# Altium PCB demo_board_shortened_DDR.PcbDoc (part 1 of 2)
Units mil, origin at the board's own origin, x right, y up, seen from the top; angles counter-clockwise.
Board outline 6000 x 4000 mil, 4 copper layers (L1, L2, L3, L4), stack 64.6 mil thick; 47 components, 45 nets, 406 pads, 119 vias.
Unrouted connection lines stored in the file: 95.
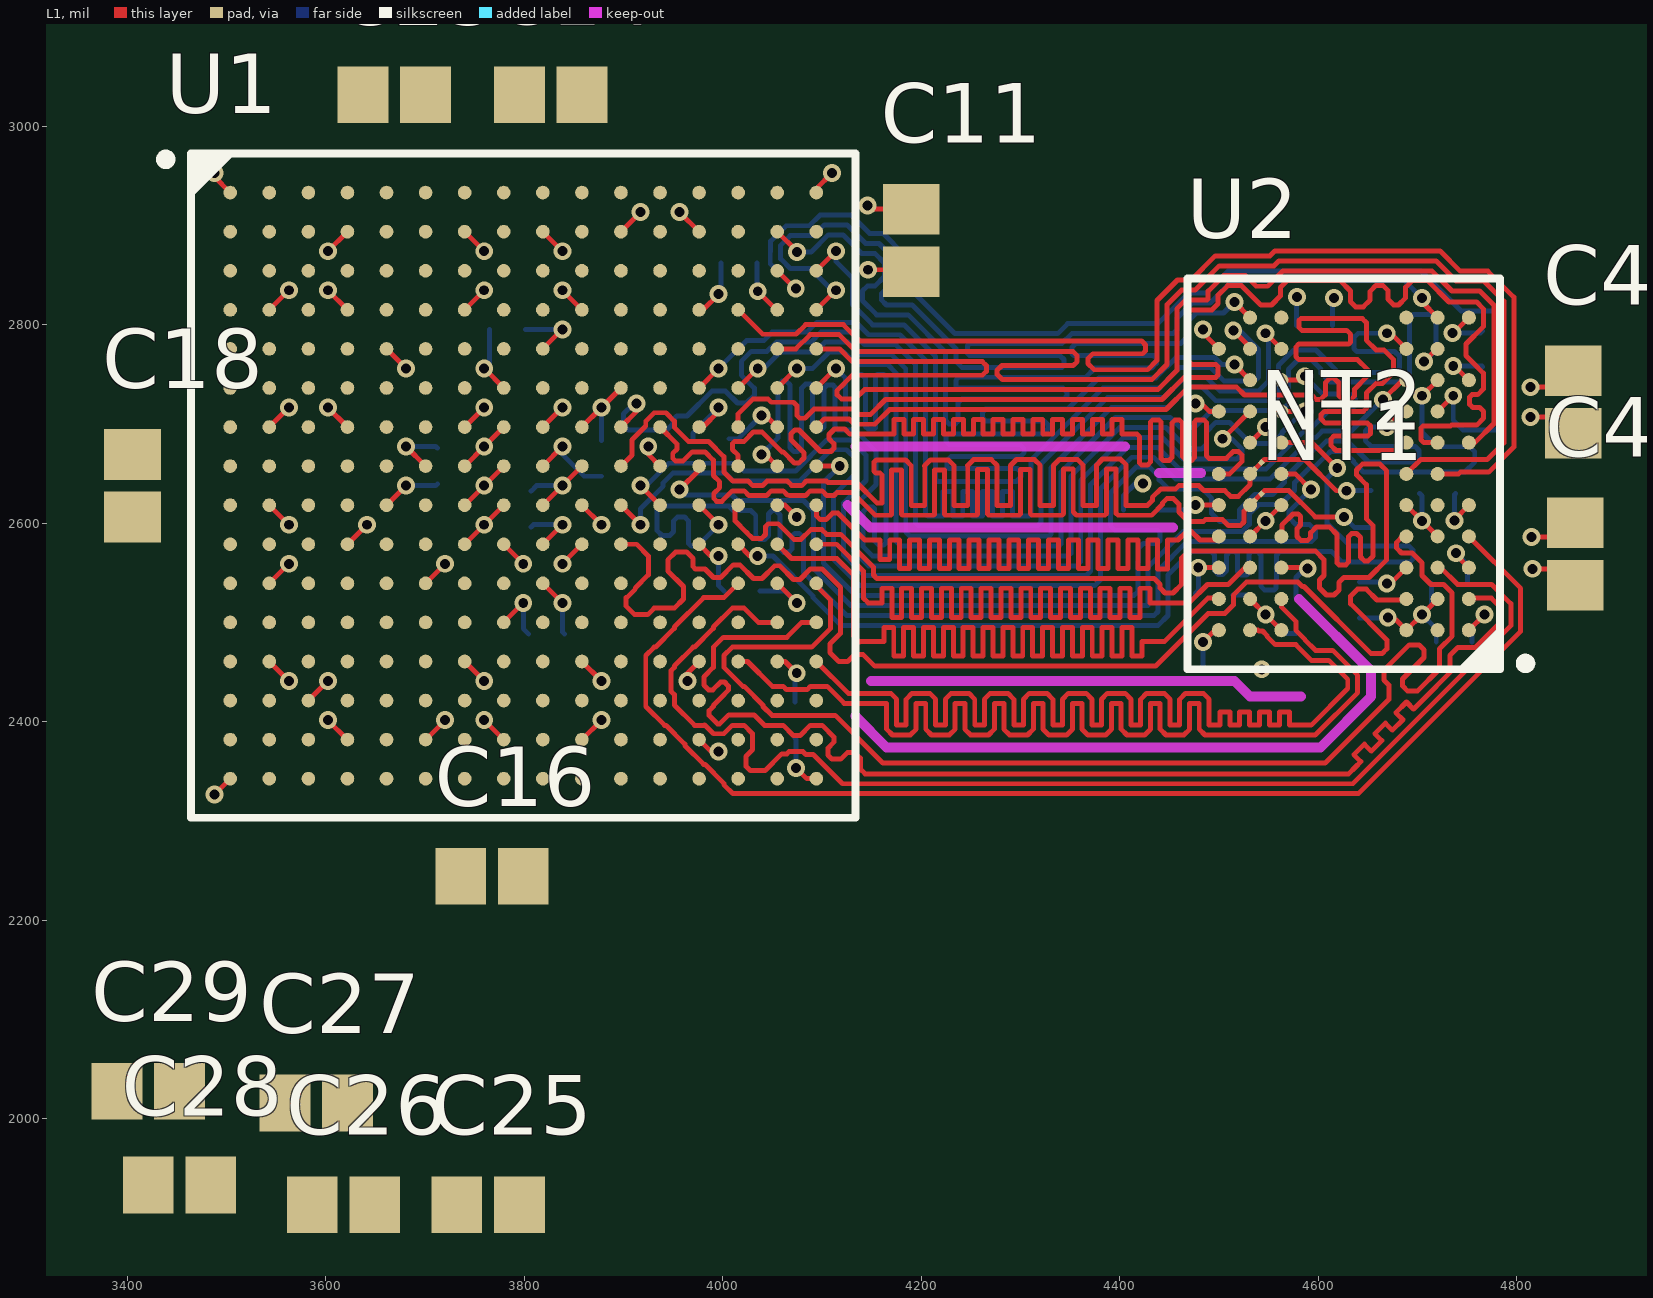
[diagram p0: L1 view]
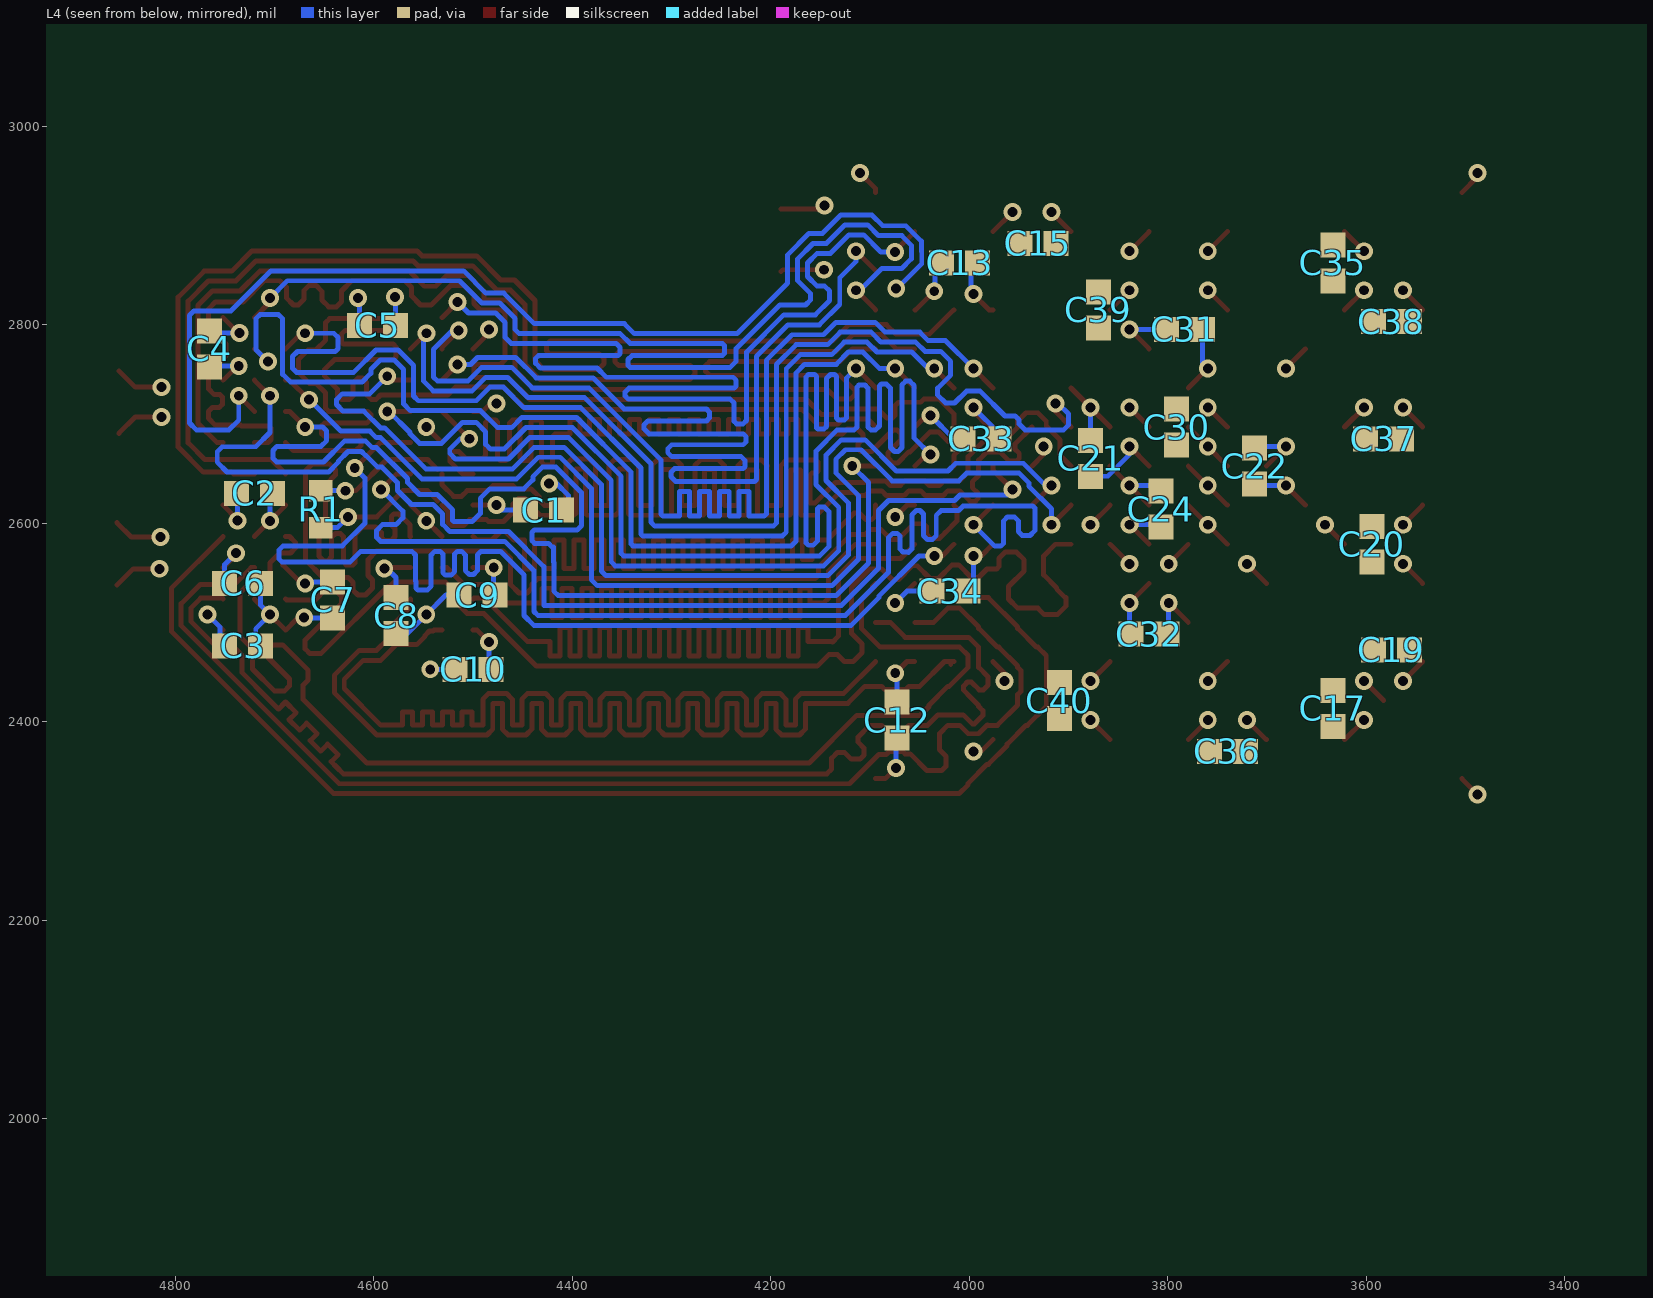
[diagram p1: L4 view, seen from below]
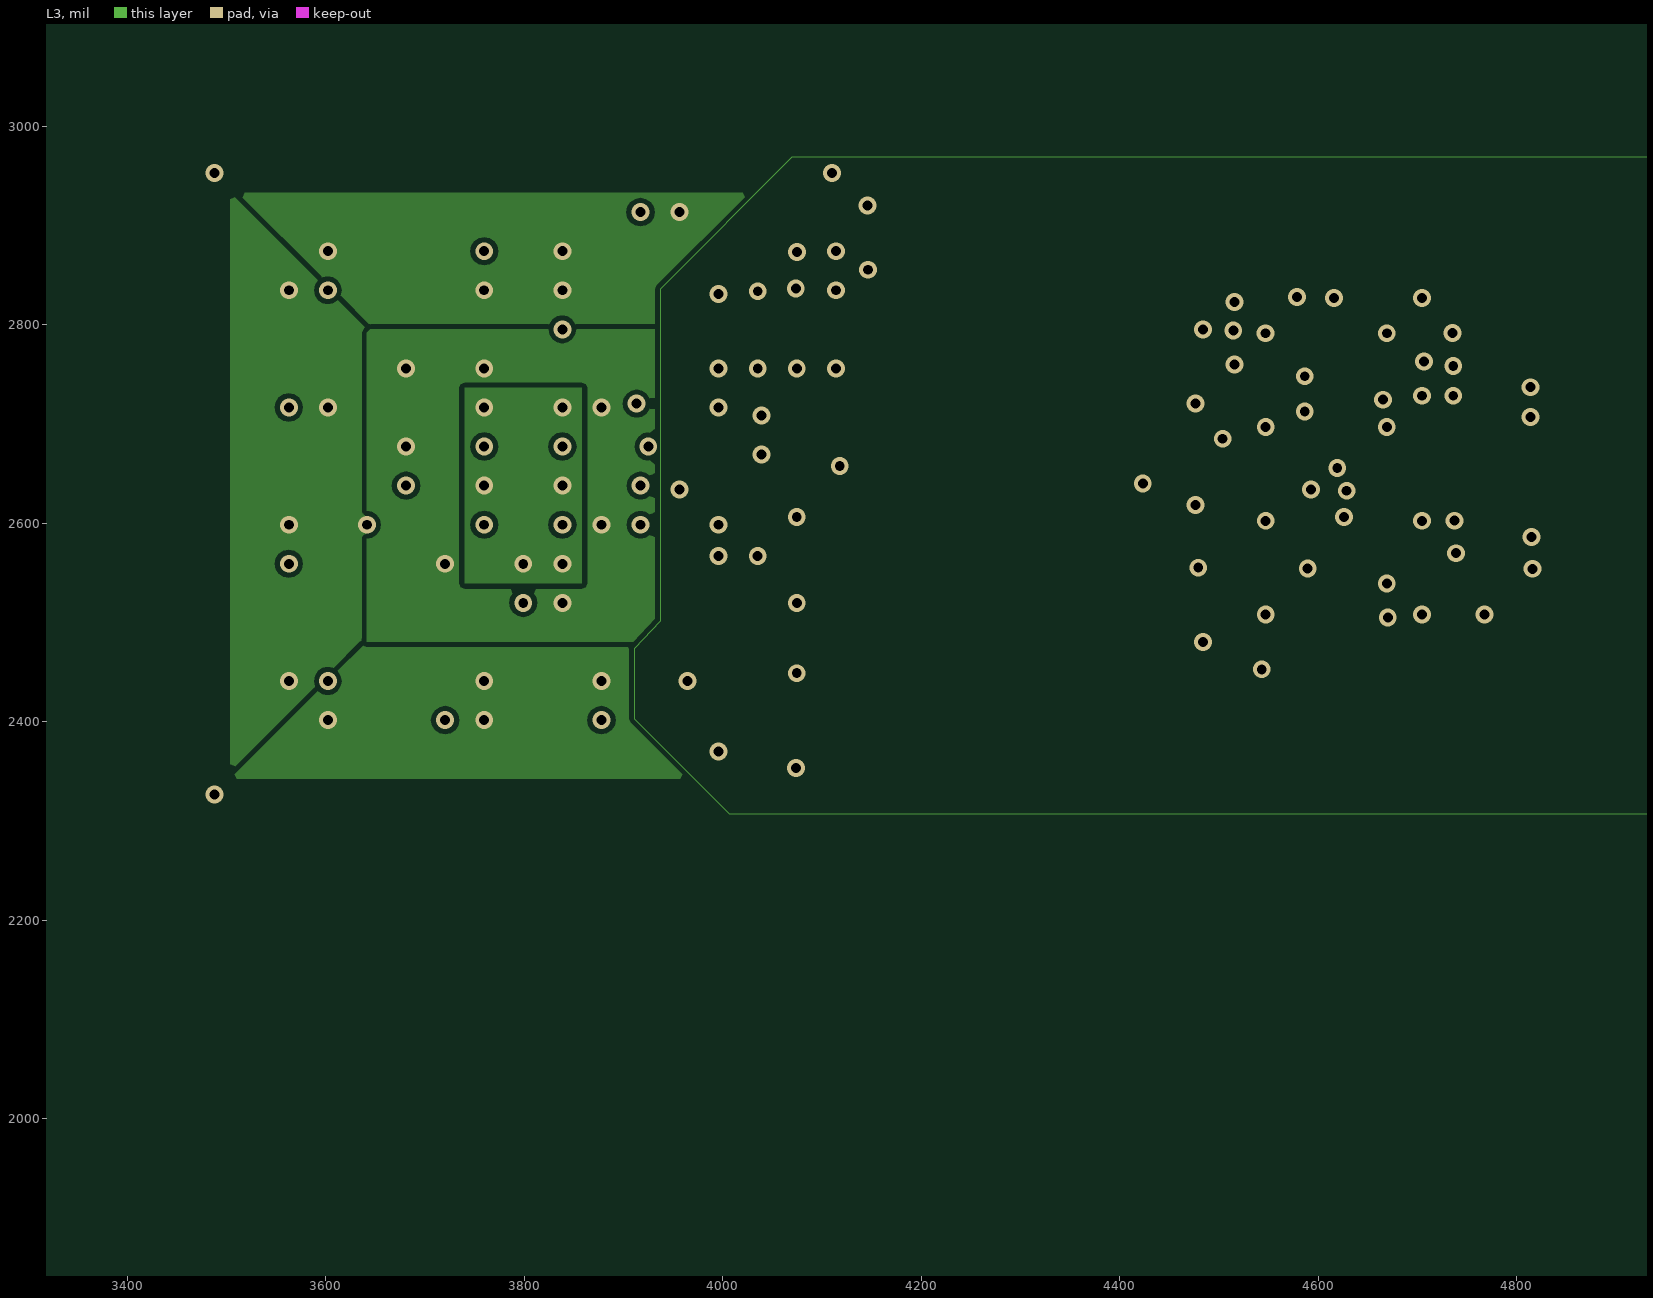
[diagram p2: L3]

## Layer stack, top to bottom
Top Solder: solder mask 0.4, Solder Resist, Dk 3.5
L1: signal copper 1.4
Prepreg 1: prepreg 6.7, FR-408, Dk 3.66
L2: signal copper 0.7
Core: core 47, FR-408, Dk 3.66
L3: signal copper 0.7
Prepreg 2: prepreg 6.7, FR-408, Dk 3.66
L4: signal copper 1.4
Bottom Solder: solder mask 0.4, Solder Resist, Dk 3.5

## Board outline
1000,1000 7000,1000 7000,5000 1000,5000

## Design rules (kind name [scope] priority, off if disabled: settings)
Clearance [All] p1: gap=5
DiffPairsRouting [All] p1: maxlimit=10 minlimit=5 mostfreqgap=5 toplayer_minwidth=5 toplayer_maxwidth=15 toplayer_prefwidth=5 midlayer1_minwidth=5 midlayer1_maxwidth=15 midlayer1_prefwidth=5 midlayer2_minwidth=5 midlayer2_maxwidth=15 midlayer2_prefwidth=5 bottomlayer_minwidth=5 bottomlayer_maxwidth=15 bottomlayer_prefwidth=5 maxuncoupledlength=500
HoleSize [All] p1: absolutevalues=TRUE maxlimit=100 minlimit=10 maxpercent=80.000 minpercent=20.000
Length "InNet('DQ6') Or InNet('DQ0')" [(InNetClass('DDR_A') OR InNetClass('DDR_D') OR InNetClass('DDR_O'))] p1: maxlimit=1285 minlimit=1275
MinimumAnnularRing [All] p1: minimumring=4
PlaneClearance [All] p1: clearance=10
PlaneConnect PlaneConnect_via [IsVia] p1: planeconnectstyle=Direct reliefexpansion=20 reliefentries=4 reliefconductorwidth=10 reliefairgap=10
PlaneConnect [All] p2: planeconnectstyle=Relief reliefexpansion=20 reliefentries=4 reliefconductorwidth=10 reliefairgap=10
PolygonConnect PolygonConnect_via [All vs IsVia] p1: connectstyle=Direct reliefconductorwidth=10 reliefentries=4 polygonreliefangle="90 Angle" airgapwidth=10
PolygonConnect [All] p2: connectstyle=Relief reliefconductorwidth=10 reliefentries=4 polygonreliefangle="90 Angle" airgapwidth=10
RoutingVias [All] p1: holewidth=10 width=32 viastyle="Through Hole" minholewidth=10 minwidth=18 maxholewidth=50 maxwidth=100
SolderMaskExpansion [All] p1: expansion=4
UnpouredPolygon [All] p1: allowunpoured=FALSE
Width [All] p1: maxlimit=100 minlimit=5 preferedwidth=10
25 further rules are at their usual default settings.

## Classes and differential pairs
net class DDR_O: BA0 BA1 BA2 CAS# CK_N CK_P CKE DM/RDQS DQS_N DQS_P NetU2_A2 ODT RAS# WE#
net class DDR_D: DQ0 DQ1 DQ2 DQ3 DQ4 DQ5 DQ6 DQ7
net class DDR_A: A0 A1 A2 A3 A4 A5 A6 A7 A8 A9 A10 A11 A12 A13
differential pair CK: +CK_P -CK_N
differential pair DQS: +DQS_P -DQS_N

## Components (designator, comment, footprint, x,y, rotation, side; value= is the part's Value field where it differs from the comment)
C1 "220n/6V3" C0402_N 4429.13,2613.19 r0 bottom
C2 "220n/6V3" C0402_N 4720.47,2629.92 r0 bottom
C3 "220n/6V3" C0402_N 4732.28,2476.38 r0 bottom
C4 "220n/6V3" C0402_N 4765.75,2775.59 r90 bottom
C5 "220n/6V3" C0402_N 4596.46,2799.21 r180 bottom
C6 "220n/6V3" C0402_N 4732.28,2539.37 r0 bottom
C7 "220n/6V3" C0402_N 4641.73,2522.64 r90 bottom
C8 "220n/6V3" C0402_N 4577.76,2506.89 r90 bottom
C9 "220n/6V3" C0402_N 4496.06,2527.56 r180 bottom
C10 "220n/6V3" C0402_N 4500,2452.76 r180 bottom
C11 "4u7/6V3" C0805_N 4189.96,2884.84 r270 top
C12 "220n/6V3" C0402_N 4072.83,2401.57 r90 bottom
C13 "220n/6V3" C0402_N 4009.84,2862.2 r0 bottom
C14 "4u7/6V3" C0805_N 3826.77,3031.5 r0 top
C15 "220n/6V3" C0402_N 3931.1,2881.89 r0 bottom
C16 "4u7/6V3" C0805_N 3767.72,2244.09 r0 top
C17 "220n/6V3" C0402_N 3633.86,2413.39 r270 bottom
C18 "4u7/6V3" C0805_N 3405.51,2637.8 r90 top
C19 "220n/6V3" C0402_N 3574.8,2472.44 r180 bottom
C20 "220n/6V3" C0402_N 3594.49,2578.74 r90 bottom
C21 "220n/6V3" C0402_N 3877.95,2665.35 r90 bottom
C22 "220n/6V3" C0402_N 3712.6,2657.48 r90 bottom
C23 "4u7/6V3" C0805_N 3669.29,3031.5 r0 top
C24 "220n/6V3" C0402_N 3807.09,2614.17 r90 bottom
C25 "4u7/6V3" C0805_N 3763.78,1913.39 r0 top
C26 "4u7/6V3" C0805_N 3618.11,1913.39 r0 top
C27 "4u7/6V3" C0805_N 3590.55,2015.75 r0 top
C28 "4u7/6V3" C0805_N 3452.76,1933.07 r0 top
C29 "4u7/6V3" C0805_N 3421.26,2027.56 r0 top
C30 "220n/6V3" C0402_N 3791.34,2696.85 r90 bottom
C31 "220n/6V3" C0402_N 3783.46,2795.28 r180 bottom
C32 "220n/6V3" C0402_N 3818.9,2488.19 r0 bottom
C33 "220n/6V3" C0402_N 3988.19,2685.04 r180 bottom
C34 "220n/6V3" C0402_N 4019.68,2531.5 r180 bottom
C35 "220n/6V3" C0402_N 3633.86,2862.2 r90 bottom
C36 "220n/6V3" C0402_N 3740.16,2370.08 r0 bottom
C37 "220n/6V3" C0402_N 3582.68,2685.04 r0 bottom
C38 "220n/6V3" C0402_N 3574.8,2803.15 r180 bottom
C39 "220n/6V3" C0402_N 3870.08,2814.96 r90 bottom
C40 "220n/6V3" C0402_N 3909.45,2421.26 r90 bottom
C41 "4u7/6V3" C0805_N 4857,2722 r270 top
C42 "4u7/6V3" C0805_N 4859,2569 r90 top
NT1 "NET TIE" NET_TIE_5MIL_2 4539.37,2625.98 r45 top net-tie
NT2 "NET TIE" NET_TIE_5MIL_2 4539.37,2657.48 r225 top net-tie
R1 "N.C." R0402_N 4653.54,2614.17 r90 bottom
U1 "XC6SLX16-2FTG256C" Xilinx_FT256 3799.21,2637.8 r0 top
U2 "AS4C128M8D2-25BCN" Alliance_FBGA60 4625.98,2649.61 r180 top

## Footprints (in the part's own frame and the unit in brackets; to place one, negate y for a bottom-side part, rotate by r counter-clockwise, add the part's x,y. Pads: shape width x height; smd on the part's side, far side on the other; paste and mask are expansions set on the pad)
Alliance_FBGA60 [mm] "BGA, 60-Leads, Body 8.00x10.00mmx1.20mm, Pitch 0.80mm"
  round 0.36 smd: A1(-3.2,4) A2(-2.4,4) A3(-1.6,4) A7(1.6,4) A8(2.4,4) A9(3.2,4) B1(-3.2,3.2) B2(-2.4,3.2) B3(-1.6,3.2) B7(1.6,3.2) B8(2.4,3.2) B9(3.2,3.2) C1(-3.2,2.4) C2(-2.4,2.4) C3(-1.6,2.4) C7(1.6,2.4) C8(2.4,2.4) C9(3.2,2.4) D1(-3.2,1.6) D2(-2.4,1.6) D3(-1.6,1.6) D7(1.6,1.6) D8(2.4,1.6) D9(3.2,1.6) E1(-3.2,0.8) E2(-2.4,0.8) E3(-1.6,0.8) E7(1.6,0.8) E8(2.4,0.8) E9(3.2,0.8) F2(-2.4,0) F3(-1.6,0) F7(1.6,0) F8(2.4,0) F9(3.2,0) G1(-3.2,-0.8) G2(-2.4,-0.8) G3(-1.6,-0.8) G7(1.6,-0.8) G8(2.4,-0.8) H2(-2.4,-1.6) H3(-1.6,-1.6) H7(1.6,-1.6) H8(2.4,-1.6) H9(3.2,-1.6) J1(-3.2,-2.4) J2(-2.4,-2.4) J3(-1.6,-2.4) J7(1.6,-2.4) J8(2.4,-2.4) K2(-2.4,-3.2) K3(-1.6,-3.2) K7(1.6,-3.2) K8(2.4,-3.2) K9(3.2,-3.2) L1(-3.2,-4) L2(-2.4,-4) L3(-1.6,-4) L7(1.6,-4) L8(2.4,-4)
  silkscreen extent -4.78,-5 4,5, body extent -4,-5 4,5, height 1.2
C0402_N [mm] "Chip Capacitor, 2-Leads, Body 1.00x0.50mm, IPC Medium Density"
  rect 0.64x0.64 smd: 1(-0.46,0) 2(0.46,0)
  body extent -0.55,-0.3 0.55,0.3, height 0.6
C0805_N [mm] "Chip Capacitor, 2-Leads, Body 2.00x1.25mm, IPC Medium Density"
  rect 1.3x1.45 smd: 1(-0.8,0) 2(0.8,0)
  body extent -1.1,-0.72 1.1,0.72, height 1.1
NET_TIE_5MIL_2 [mil] "5mil net tie with 2 pins"
  rect 5x5 smd paste-10 mask-10: 1(-5,0) 2(5,0)
  L1 lines w5: -5,0 5,0
R0402_N [mm] "Chip Resistor, 2-Leads, Body 1.05x0.54mm, IPC Medium Density"
  rect 0.55x0.6 smd: 1(-0.475,0) 2(0.475,0)
  body extent -0.55,-0.3 0.55,0.3, height 0.4
Xilinx_FT256 [mm] "BGA, 256-Leads, Body 17.00x17.00mmx1.55mm, Pitch 1.00mm"
  round 0.35 smd: A1(-7.5,7.5) A2(-6.5,7.5) A3(-5.5,7.5) A4(-4.5,7.5) A5(-3.5,7.5) A6(-2.5,7.5) A7(-1.5,7.5) A8(-0.5,7.5) A9(0.5,7.5) A10(1.5,7.5) A11(2.5,7.5) A12(3.5,7.5) A13(4.5,7.5) A14(5.5,7.5) A15(6.5,7.5) A16(7.5,7.5) B1(-7.5,6.5) B2(-6.5,6.5) B3(-5.5,6.5) B4(-4.5,6.5) B5(-3.5,6.5) B6(-2.5,6.5) B7(-1.5,6.5) B8(-0.5,6.5) B9(0.5,6.5) B10(1.5,6.5) B11(2.5,6.5) B12(3.5,6.5) B13(4.5,6.5) B14(5.5,6.5) B15(6.5,6.5) B16(7.5,6.5) C1(-7.5,5.5) C2(-6.5,5.5) C3(-5.5,5.5) C4(-4.5,5.5) C5(-3.5,5.5) C6(-2.5,5.5) C7(-1.5,5.5) C8(-0.5,5.5) C9(0.5,5.5) C10(1.5,5.5) C11(2.5,5.5) C12(3.5,5.5) C13(4.5,5.5) C14(5.5,5.5) C15(6.5,5.5) C16(7.5,5.5) D1(-7.5,4.5) D2(-6.5,4.5) D3(-5.5,4.5) D4(-4.5,4.5) D5(-3.5,4.5) D6(-2.5,4.5) D7(-1.5,4.5) D8(-0.5,4.5) D9(0.5,4.5) D10(1.5,4.5) D11(2.5,4.5) D12(3.5,4.5) D13(4.5,4.5) D14(5.5,4.5) D15(6.5,4.5) D16(7.5,4.5) E1(-7.5,3.5) E2(-6.5,3.5) E3(-5.5,3.5) E4(-4.5,3.5) E5(-3.5,3.5) E6(-2.5,3.5) E7(-1.5,3.5) E8(-0.5,3.5) E9(0.5,3.5) E10(1.5,3.5) E11(2.5,3.5) E12(3.5,3.5) E13(4.5,3.5) E14(5.5,3.5) E15(6.5,3.5) E16(7.5,3.5) F1(-7.5,2.5) F2(-6.5,2.5) F3(-5.5,2.5) F4(-4.5,2.5) F5(-3.5,2.5) F6(-2.5,2.5) F7(-1.5,2.5) F8(-0.5,2.5) F9(0.5,2.5) F10(1.5,2.5) F11(2.5,2.5) F12(3.5,2.5) F13(4.5,2.5) F14(5.5,2.5) F15(6.5,2.5) F16(7.5,2.5) G1(-7.5,1.5) G2(-6.5,1.5) G3(-5.5,1.5) G4(-4.5,1.5) G5(-3.5,1.5) G6(-2.5,1.5) G7(-1.5,1.5) G8(-0.5,1.5) G9(0.5,1.5) G10(1.5,1.5) G11(2.5,1.5) G12(3.5,1.5) G13(4.5,1.5) G14(5.5,1.5) G15(6.5,1.5) G16(7.5,1.5) H1(-7.5,0.5) H2(-6.5,0.5) H3(-5.5,0.5) H4(-4.5,0.5) H5(-3.5,0.5) H6(-2.5,0.5) H7(-1.5,0.5) H8(-0.5,0.5) H9(0.5,0.5) H10(1.5,0.5) H11(2.5,0.5) H12(3.5,0.5) H13(4.5,0.5) H14(5.5,0.5) H15(6.5,0.5) H16(7.5,0.5) J1(-7.5,-0.5) J2(-6.5,-0.5) J3(-5.5,-0.5) J4(-4.5,-0.5) J5(-3.5,-0.5) J6(-2.5,-0.5) J7(-1.5,-0.5) J8(-0.5,-0.5) J9(0.5,-0.5) J10(1.5,-0.5) J11(2.5,-0.5) J12(3.5,-0.5) J13(4.5,-0.5) J14(5.5,-0.5) J15(6.5,-0.5) J16(7.5,-0.5) K1(-7.5,-1.5) K2(-6.5,-1.5) K3(-5.5,-1.5) K4(-4.5,-1.5) K5(-3.5,-1.5) K6(-2.5,-1.5) K7(-1.5,-1.5) K8(-0.5,-1.5) K9(0.5,-1.5) K10(1.5,-1.5) K11(2.5,-1.5) K12(3.5,-1.5) K13(4.5,-1.5) K14(5.5,-1.5) K15(6.5,-1.5) K16(7.5,-1.5) L1(-7.5,-2.5) L2(-6.5,-2.5) L3(-5.5,-2.5) L4(-4.5,-2.5) L5(-3.5,-2.5) L6(-2.5,-2.5) L7(-1.5,-2.5) L8(-0.5,-2.5) L9(0.5,-2.5) L10(1.5,-2.5) L11(2.5,-2.5) L12(3.5,-2.5) L13(4.5,-2.5) L14(5.5,-2.5) L15(6.5,-2.5) L16(7.5,-2.5) M1(-7.5,-3.5) M2(-6.5,-3.5) M3(-5.5,-3.5) M4(-4.5,-3.5) M5(-3.5,-3.5) M6(-2.5,-3.5) M7(-1.5,-3.5) M8(-0.5,-3.5) M9(0.5,-3.5) M10(1.5,-3.5) M11(2.5,-3.5) M12(3.5,-3.5) M13(4.5,-3.5) M14(5.5,-3.5) M15(6.5,-3.5) M16(7.5,-3.5) N1(-7.5,-4.5) N2(-6.5,-4.5) N3(-5.5,-4.5) N4(-4.5,-4.5) N5(-3.5,-4.5) N6(-2.5,-4.5) N7(-1.5,-4.5) N8(-0.5,-4.5) N9(0.5,-4.5) N10(1.5,-4.5) N11(2.5,-4.5) N12(3.5,-4.5) N13(4.5,-4.5) N14(5.5,-4.5) N15(6.5,-4.5) N16(7.5,-4.5) P1(-7.5,-5.5) P2(-6.5,-5.5) P3(-5.5,-5.5) P4(-4.5,-5.5) P5(-3.5,-5.5) P6(-2.5,-5.5) P7(-1.5,-5.5) P8(-0.5,-5.5) P9(0.5,-5.5) P10(1.5,-5.5) P11(2.5,-5.5) P12(3.5,-5.5) P13(4.5,-5.5) P14(5.5,-5.5) P15(6.5,-5.5) P16(7.5,-5.5) R1(-7.5,-6.5) R2(-6.5,-6.5) R3(-5.5,-6.5) R4(-4.5,-6.5) R5(-3.5,-6.5) R6(-2.5,-6.5) R7(-1.5,-6.5) R8(-0.5,-6.5) R9(0.5,-6.5) R10(1.5,-6.5) R11(2.5,-6.5) R12(3.5,-6.5) R13(4.5,-6.5) R14(5.5,-6.5) R15(6.5,-6.5) R16(7.5,-6.5) T1(-7.5,-7.5) T2(-6.5,-7.5) T3(-5.5,-7.5) T4(-4.5,-7.5) T5(-3.5,-7.5) T6(-2.5,-7.5) T7(-1.5,-7.5) T8(-0.5,-7.5) T9(0.5,-7.5) T10(1.5,-7.5) T11(2.5,-7.5) T12(3.5,-7.5) T13(4.5,-7.5) T14(5.5,-7.5) T15(6.5,-7.5) T16(7.5,-7.5)
  silkscreen extent -9.27,-8.5 8.5,8.5, body extent -8.5,-8.5 8.5,8.5, height 1.55

## Part data
C1 C2 C3 C4 C5 C6 C7 C8 C9 C10 C11 C12 C13 C14 C15 C16 C17 C18 C19 C20 C21 C22 C23 C24 C25 C26 C27 C28 C29 C30 C31 C32 C33 C34 C35 C36 C37 C38 C39 C40 C41 C42: library part C
R1: library part R

## Via types
v1: diameter 18, hole 10, L1 to L4, 119 vias

## Nets (pads, with @x,y where several pads share a name; then routed paths per layer and width w, separated by ;. In a path a pad name is that pad's centre, name@x,y a point inside that pad or via, vN(x,y) a via of type N, cw(c..) or ccw(c..) an arc to the next point about the centre after c; other vN are vias at no path point)
A0: U1.H15 U2.H8 | length 1157.4
  L1 w5: v1(4039.18,2669.1) 4039.18,2673.05 4039.36,2673.24 4041.34,2671.26 U1.H15@4055.12,2657.48 ; v1(4503.93,2685.03) U2.H8@4531.5,2712.6
  L4 w5: v1(4039.18,2669.1) 4055.68,2685.6 4055.68,2738.75 4060.04,2743.11 4064.26,2743.11 4067.91,2739.46 4067.91,2676.18 4071.85,2672.24 4075.59,2672.24 4079.52,2676.18 4079.52,2736.02 4083.66,2740.16 4088.58,2740.16 4090.55,2738.19 4090.55,2697.83 4094.41,2693.97 4099.41,2693.97 4102.36,2696.93 4102.36,2736.22 4105.31,2739.17 4111.22,2739.17 4113.19,2737.2 4113.19,2696.93 4116.14,2693.97 4133.22,2693.97 4154.6,2672.59 4154.6,2638.85 4131.69,2615.94 4131.69,2572.15 4146.8,2557.05 4356.95,2557.05 4360.93,2561.02 4360.93,2643.13 4404.18,2686.39 4442.7,2686.39 4464.41,2664.68 4518.03,2664.68 4523.62,2670.28 4523.62,2674.53 4513.12,2685.03 v1(4503.93,2685.03)
A1: U1.H16 U2.H3 | length 1155.3
  L1 w5: U1.H16@4094.49,2657.48 v1(4118.1,2657.47) ; v1(4669.29,2696.85) 4685.04,2712.6 U2.H3@4688.98,2712.6
  L4 w5: v1(4118.1,2657.47) 4101.69,2641.07 4101.69,2559.72 4134.37,2527.05 4414.37,2527.05 4418.82,2531.5 4418.82,2560.37 4419.29,2560.84 4419.29,2575.79 ; 4420.28,2575.79 4424.12,2579.63 4438.08,2579.63 4440.94,2582.49 4440.94,2590.55 4438.41,2593.09 4395.32,2593.09 4390.93,2597.48 4390.93,2630.71 4416.61,2656.39 4430.28,2656.39 4439.94,2646.73 4439.94,2643.7 4449.03,2634.61 4483.27,2634.61 4492.88,2625 4492.88,2609.72 4500.98,2601.62 4519.48,2601.62 4520.74,2602.88 4520.74,2613.34 4536.27,2628.86 4554.06,2628.86 4566.25,2641.06 4566.25,2644.96 4597.39,2676.1 4601.73,2676.1 4608.27,2682.63 4629.82,2682.63 4650.87,2661.57 4697.99,2661.57 4701.77,2665.35 4701.77,2673.23 4697.83,2677.17 4653.54,2677.17 4647.64,2683.07 4647.64,2692.91 4651.57,2696.85 v1(4669.29,2696.85)
A2: U1.F16 U2.H7 | length 1157.6
  L1 w5: U1.F16@4094.49,2736.22 v1(4114.17,2755.91) ; U2.H7@4562.99,2712.6 v1(4586.61,2712.6)
  L4 w5: v1(4114.17,2755.91) 4124,2746.08 4124,2705.97 4126,2703.97 4131.98,2703.97 4134,2706 4134,2747.84 4136,2749.84 4140,2749.84 4144,2745.84 4144,2697.34 4146.67,2694.67 4152.67,2694.67 4154,2696 4154,2747.84 4156,2749.84 4162.16,2749.84 4164.6,2747.4 4164.6,2579.96 4162.4,2577.76 4157.48,2577.76 4153,2582.24 4153,2614.72 4151.57,2616.14 4146.04,2616.14 4141.69,2611.79 4141.69,2576.29 4150.94,2567.05 4348.43,2567.05 4350.93,2569.55 4350.93,2647.28 4400.04,2696.39 4446.85,2696.39 4468.55,2674.68 4482.76,2674.68 4487.43,2679.36 4487.43,2691.87 4497.09,2701.53 4510.76,2701.53 4531.95,2680.35 4554.08,2680.35 4563.74,2690.02 4563.74,2691.31 4585.04,2712.6 v1(4586.61,2712.6)
A3: U1.H13 U2.J2 | length 1157.8
  L1 w5: v1(3956.69,2633.86) 3976.38,2653.54 U1.H13@3976.38,2657.48 ; v1(4704.72,2728.35) U2.J2@4720.47,2744.09
  L4 w5: v1(3956.69,2633.86) 3962.22,2628.33 4009.47,2628.33 4015,2622.79 4081.63,2622.79 4091.69,2612.73 4091.69,2554.41 4129.06,2517.05 4428.82,2517.05 4428.82,2556.22 4464.21,2591.62 4523.62,2591.62 4530.74,2598.74 4530.74,2609.2 4540.41,2618.86 4562.24,2618.86 4576.25,2632.87 4576.25,2640.82 4591.93,2656.5 4596.27,2656.5 4608.18,2668.4 4608.75,2668.4 4612.5,2672.14 4626.17,2672.14 4635.83,2662.48 4635.83,2661.41 4645.67,2651.57 4748.03,2651.57 4757.87,2661.42 4757.87,2672 4752.87,2677 4719,2677 4704.72,2691.28 v1(4704.72,2728.35)
A4: U1.C16 U2.J8 | length 1153.7
  L1 w5: U1.C16@4094.49,2854.33 v1(4114.17,2874.02) ; v1(4515.75,2759.84) U2.J8@4531.5,2744.09
  L4 w5: v1(4114.17,2874.02) 4114.17,2863.83 4130.67,2847.33 4130.67,2820.35 4151.18,2799.84 4182.87,2799.84 4214.6,2768.11 4214.6,2644 4216.55,2642.05 4295.97,2642.05 4300.93,2647 4300.93,2651.07 4297,2655 4228,2655 4226,2657 4226,2663 4230,2667 4299.94,2667 4304,2671.06 4304,2675 4300,2679 4228,2679 4225,2682 4225,2687 4228,2690 4322.94,2690 4327.94,2695 4327.94,2699.06 4324,2703 4265,2703 4262,2706 4262,2712 4265,2715 4347.94,2715 4379.33,2746.39 4436.54,2746.39 4457.12,2766.97 4495.64,2766.97 4502.77,2759.84 v1(4515.75,2759.84)
A5: U1.J11 U2.J3 | length 1155.3
  L1 w5: U1.J11@3897.64,2618.11 v1(3917.32,2598.43) ; v1(4665.34,2724.4) 4685.04,2744.09 U2.J3@4688.98,2744.09
  L4 w5: v1(3917.32,2598.43) 3917.32,2614.46 3940.19,2637.33 3940.19,2640.69 3949.86,2650.36 4002.9,2650.36 4010.65,2642.6 4077.83,2642.6 4109.2,2673.97 4124.94,2673.97 4134.6,2664.31 4134.6,2650.64 4111.69,2627.73 4111.69,2563.87 4138.51,2537.05 4375,2537.05 4380.93,2542.97 4380.93,2634.85 4412.47,2666.39 4434.42,2666.39 4456.2,2644.61 4487.41,2644.61 4487.48,2644.68 4551.83,2644.68 4593.25,2686.1 4597.59,2686.1 4604.13,2692.63 4633.22,2692.63 4664.99,2724.4 v1(4665.34,2724.4) v1@4666.5,2724.4
A6: U1.J12 U2.J7 | length 1155.7
  L1 w5: v1(3917.32,2637.8) U1.J12@3937.01,2618.11 ; U2.J7@4562.99,2744.09 4586.6,2744.09 v1(4586.6,2748.03)
  L4 w5: v1(3917.32,2637.8) 3923.15,2637.8 3945.72,2660.36 4013.85,2660.36 4021.61,2652.6 4073.69,2652.6 4105.06,2683.97 4129.08,2683.97 4144.6,2668.45 4144.6,2642.99 4121.69,2620.08 4121.69,2568.01 4142.65,2547.05 4366.14,2547.05 4370.93,2551.83 4370.93,2638.99 4408.33,2676.39 4438.56,2676.39 4460.27,2654.68 4547.69,2654.68 4589.11,2696.1 4593.45,2696.1 4610.24,2712.89 4631.19,2712.89 4637.8,2719.49 4637.8,2724.41 4631.89,2730.32 4604.32,2730.32 v1(4586.6,2748.03)
A7: U1.F15 U2.K2 | length 1150.3
  L1 w5: U1.F15@4055.12,2736.22 v1(4074.8,2755.91) ; v1(4706.69,2762.8) 4719.49,2775.59 U2.K2@4720.47,2775.59
  L4 w5: v1(4074.8,2755.91) 4090.84,2755.91 4107.34,2772.41 4122.05,2772.41 4133.86,2760.59 4133.86,2759.84 4166.3,2759.84 4174.6,2751.54 4174.6,2582 4179.55,2577.05 4338.97,2577.05 4340.93,2579 4340.93,2651.42 4395.9,2706.39 4450.99,2706.39 4461.19,2696.19 4475.43,2696.19 4492.58,2713.34 4540.4,2713.34 4563.35,2713.35 4570.1,2720.1 4570.1,2754.86 4579.77,2764.53 4593.44,2764.53 4603.1,2754.86 4603.1,2750.94 4612.04,2742 4684,2742 4692,2750 4692,2806 4696.27,2810.27 4714.73,2810.27 4718.97,2806.03 4718.97,2774.97 4706.8,2762.8 v1(4706.69,2762.8)
A8: U1.F13 U2.K8 | length 1150.8
  L1 w5: U1.F13@3976.38,2736.22 v1(3996.06,2755.91) ; v1(4514.62,2794.14) 4531.5,2777.27 U2.K8@4531.5,2775.59
  L4 w5: v1(3996.06,2755.91) 4024.08,2783.92 4041.53,2783.92 4050.02,2792.41 4084.91,2792.41 4094.91,2802.41 4134.47,2802.41 4147.04,2789.84 4178.73,2789.84 4204.6,2763.97 4204.6,2609.45 4207,2607.05 4217,2607.05 4222,2607.05 4222,2632.05 4232,2632.05 4232,2607.05 4242,2607.05 4242,2632.05 4252,2632.05 4252,2607.05 4262,2607.05 4262,2632.05 4272,2632.05 4272,2607.05 4282,2607.05 4282,2632.05 4292,2632.05 4292,2607.05 4294,2607.05 4308.97,2607.05 4310.93,2609 4310.93,2663.84 4383.47,2736.39 4440.68,2736.39 4461.26,2756.97 4491.5,2756.97 4505.13,2743.34 4527.98,2743.34 4536.21,2743.35 4540,2747.14 4540,2775.23 4521.09,2794.14 v1(4514.62,2794.14)
A9: U1.F14 U2.K3 | length 1153.4
  L1 w5: U1.F14@4015.75,2736.22 v1(4035.43,2755.91) ; v1(4669.29,2791.34) 4673.23,2791.34 U2.K3@4688.98,2775.59
  L4 w5: v1(4035.43,2755.91) 4041.8,2755.91 4058.3,2772.41 4093.2,2772.41 4103.2,2782.41 4126.19,2782.41 4138.75,2769.84 4170.44,2769.84 4184.6,2755.68 4184.6,2591 4188.55,2587.05 4329,2587.05 4330.93,2588.97 4330.93,2655.56 4391.76,2716.39 4448.96,2716.39 4469.54,2736.97 4483.21,2736.97 4496.84,2723.34 4536.26,2723.34 4555.35,2723.35 4560.1,2728.1 4560.1,2759 4575.63,2774.53 4598,2774.53 4620.53,2752 4678,2752 4682,2756 4682,2768 4677,2773 4639,2773 4636,2776 4636,2787 4640.34,2791.34 v1(4669.29,2791.34)
A10: U1.C15 U2.H2 | length 1156.2
  L1 w5: U1.C15@4055.12,2854.33 4072.83,2836.61 v1(4073.82,2836.61) ; U2.H2@4720.47,2712.6 v1(4736.21,2728.34)
  L4 w5: v1(4073.82,2836.61) 4072.76,2836.61 4048.05,2861.32 4048.05,2873 4048.5,2873.45 4048.5,2884.15 4064.03,2899.67 4087.51,2899.67 4098.36,2910.52 4129.58,2910.52 4148.28,2891.82 4161.77,2891.82 4183.15,2870.43 4183.15,2841.98 4234.14,2791 4337.72,2791 4347.72,2801 4438.36,2801 4469.13,2831.78 4487.21,2831.78 4509.69,2854.26 4703.74,2854.26 4744.2,2813.8 4781.45,2813.8 4785.85,2809.41 4785.85,2700.85 4779,2694 4746,2694 4736.21,2703.79 v1(4736.21,2728.34)
A11: U1.G11 U2.K7 | length 1154.9
  L1 w5: U1.G11@3897.64,2696.85 3913.38,2712.59 v1(3913.38,2720.47) ; v1(4547.23,2791.33) U2.K7@4562.99,2775.59
  L4 w5: v1(3913.38,2720.47) 3910.47,2720.47 3900,2710 3900,2699 3905,2694 3944,2694 3949.98,2699.98 3949.98,2703.98 3954,2708 3964.19,2708 3989.23,2733.04 4002.96,2733.04 4015,2721 4024,2721 4032,2729 4032,2736 4018.93,2749.07 4018.93,2763.03 4029,2773.09 4044.85,2773.09 4054.16,2782.41 4089.05,2782.41 4099.05,2792.41 4130.33,2792.41 4142.89,2779.84 4174.58,2779.84 4194.6,2759.82 4194.6,2600 4197.55,2597.05 4317,2597.05 4320.93,2600.97 4320.93,2659.7 4387.61,2726.39 4444.82,2726.39 4465.4,2746.97 4487.35,2746.97 4500.98,2733.34 4532.12,2733.34 ; 4532.13,2733.35 4540.35,2733.35 4550,2743 4550,2788.57 v1(4547.23,2791.33)
A12: U1.D16 U2.L2 | length 1153.2
  L1 w5: U1.D16@4094.49,2814.96 v1(4114.17,2834.65) ; v1(4704.71,2826.77) 4704.71,2822.84 U2.L2@4720.47,2807.09
  L4 w5: v1(4114.17,2834.65) 4110.24,2834.65 4088.35,2856.53 4068.31,2856.53 4058.5,2866.34 4058.5,2880.01 4068.17,2889.67 4091.65,2889.67 4102.5,2900.52 4125.44,2900.52 4144.14,2881.82 4157.63,2881.82 4173.15,2866.29 4173.15,2844.34 4160,2831.18 4160,2825 4165.16,2819.84 4191.15,2819.84 4235,2775.99 4235,2763 4241,2757 4342,2757 4344,2759 4344,2764.86 4339.86,2769 4249,2769 4247,2771 4247,2779 4249,2781 4341.86,2781 4351.86,2791 4453.75,2791 4457.75,2795 4457.75,2806.25 4473.28,2821.78 4491.35,2821.78 4513.83,2844.26 4687.22,2844.26 v1(4704.71,2826.77)
A13: U1.B15 U2.L8 | length 1153.1
  L1 w5: U1.B15@4055.12,2893.7 4075,2873.82 v1(4075,2873.17) ; v1(4515.75,2822.83) U2.L8@4531.5,2807.09
  L4 w5: v1(4075,2873.17) 4089.02,2873.17 4089.16,2873.03 4106.64,2890.52 4121.3,2890.52 4140,2871.82 4153.49,2871.82 4163.15,2862.15 4163.15,2848.48 4153.49,2838.82 4145.81,2838.82 4141,2834 4141,2824.16 4155.32,2809.84 4187.01,2809.84 4224.6,2772.25 4224.6,2703.4 4228,2700 4234.5,2700 4237,2702.5 4237,2721 4241,2725 4343.8,2725 4346.9,2728.1 4346.9,2732.1 4343,2736 4237,2736 4235,2738 4235,2744 4238,2747 4365.8,2747 4375.19,2756.39 4432.4,2756.39 4437,2761 4437,2766 4434,2769 4354,2769 4352,2771 4352,2777 4356,2781 4461.75,2781 4467.75,2787 4467.75,2802.11 4477.42,2811.78 4504.69,2811.78 v1(4515.75,2822.83)
BA0: U1.G14 U2.G2 | length 1280.7
  L1 w5: U1.G14@4015.75,2696.85 4015.75,2710.13 4030.59,2724.97 4046.01,2724.97 4049.16,2721.83 4071.48,2721.83 4074.8,2718.5 4074.8,2708.66 4077.76,2705.71 4083,2705.71 4092.17,2714.88 4131.8,2714.88 4137.02,2709.67 4149.26,2709.67 4164.16,2724.57 4442.71,2724.57 4465.11,2746.97 4496.97,2746.97 4499.25,2749.25 4499.25,2757.64 4497.05,2759.84 4472.44,2759.84 4467.75,2764.53 4467.75,2811.04 4471.67,2814.96 4493.11,2814.96 4499.25,2821.1 4499.25,2829.67 4508.91,2839.33 4522.87,2839.33 4542.32,2819.88 4553.15,2819.88 4562.24,2828.97 4562.24,2837.6 4568.9,2844.26 4622.28,2844.26 4632.64,2833.89 4632.64,2823.07 4637.8,2817.91 4645.67,2817.91 4652.56,2824.8 4652.56,2833.66 4658.46,2839.57 4665.35,2839.57 4670.28,2834.65 4670.28,2825.79 4676.2,2819.86 4681.12,2819.86 4688.21,2826.95 4688.21,2837.82 4694.65,2844.26 4710.56,2844.26 4731.98,2822.83 4759.74,2822.83 4766.55,2816.02 4766.55,2798.05 4749.02,2780.51 4749.02,2768.7 4756.89,2760.83 4766.55,2751.16 4766.55,2735.24 4760.83,2729.51 4755.1,2729.51 4752.71,2727.12 4752.71,2719.73 4755.91,2716.54 4762.8,2716.54 4766.73,2712.6 4766.73,2705.71 4759.84,2698.82 4734.25,2698.82 4733.45,2698.01 4705.89,2698.01 4703.56,2695.69 4703.56,2684.23 4706.69,2681.1 U2.G2@4720.47,2681.1
BA1: U1.G16 U2.G3 | length 1279.5
  L1 w5: U1.G16@4094.49,2696.85 4102.52,2704.88 4127.66,2704.88 4132.87,2699.67 4153.41,2699.67 4168.31,2714.57 4446.85,2714.57 4469.26,2736.97 4517.99,2736.97 4525.86,2729.1 4593.45,2729.1 4598.14,2724.41 4602.36,2724.41 4607.28,2729.33 4607.28,2741.63 4611.71,2746.06 4616.14,2746.06 4621.06,2741.14 4621.06,2728.35 4625,2724.41 4632.87,2724.41 4636.81,2728.35 4636.81,2735.24 4649.61,2748.03 4649.61,2754.92 4639.76,2764.76 4580.71,2764.76 4577.58,2767.89 4577.58,2777.38 4580.71,2780.51 4630.91,2780.51 4632.87,2782.48 4632.87,2790.35 4628.94,2794.29 4583.66,2794.29 4580.71,2797.24 4580.71,2804.13 4582.68,2806.1 4644.69,2806.1 4648.62,2802.17 4648.62,2784.45 4658.46,2774.61 4666.34,2774.61 4676.18,2764.76 4676.18,2751.97 4665.12,2740.9 4658.51,2740.9 4648.84,2731.24 4648.84,2715.77 4645.67,2712.6 4606.3,2712.6 4603.11,2709.41 4603.11,2704.96 4607.28,2700.79 4649.84,2700.79 4652.79,2697.83 4652.79,2690.19 4650.59,2687.99 4616.14,2687.99 4613.19,2685.04 4613.19,2678.15 4618.11,2673.23 4681.1,2673.23 U2.G3@4688.98,2681.1
BA2: U1.E16 U2.G1 | length 1281.1
  L1 w5: U1.E16@4094.49,2775.59 4117.82,2775.59 4130.67,2762.74 4261.81,2762.74 4265.75,2758.8 4265.75,2752.95 4261.81,2749.02 4130.73,2749.02 4130.67,2749.07 4123.03,2741.43 4123.03,2741.14 4115.16,2733.27 4115.16,2729.33 4115.63,2729.33 4120.08,2724.88 4133.35,2724.88 4143.03,2734.57 4438.57,2734.57 4457.75,2753.75 4457.75,2816.02 4466.69,2824.96 4488.19,2824.96 4489.25,2826.02 4489.25,2833.81 4504.77,2849.33 4527.01,2849.33 4537.63,2838.71 4549.21,2838.71 4564.76,2854.26 4714.7,2854.26 4735.04,2833.92 4762.8,2833.92 4777.24,2819.47 4777.24,2700.4 4757.95,2681.1 U2.G1@4751.97,2681.1
CAS#: U1.K14 U2.G7 | length 1158.3
  L1 w5: U1.K14@4015.75,2578.74 4027.56,2566.92 v1(4035.43,2566.92) ; U2.G7@4562.99,2681.1 4593.87,2681.1 v1(4619.33,2655.64)
  L4 w5: v1(4035.43,2566.92) 4050.9,2566.92 4091.3,2526.52 4091.3,2524.84 4119.09,2497.05 4438.98,2497.05 4448.82,2506.89 4448.82,2547.94 4472.5,2571.62 4492.13,2571.62 4495.83,2567.91 4495.83,2552.17 4499.77,2548.23 4503.94,2548.23 4507.87,2552.17 4507.87,2567.91 4511.58,2571.62 4515.98,2571.62 4518.7,2568.9 4518.7,2551.18 4522.22,2547.66 4527.97,2547.66 4530.51,2550.2 4530.51,2568.9 4533.23,2571.62 4538.62,2571.62 4542.32,2567.91 4542.32,2536.42 4546.26,2532.48 4555.69,2532.48 4557.66,2534.45 4557.66,2541.12 4558.07,2541.53 4558.07,2567.91 4561.78,2571.62 4613.42,2571.62 4624.02,2561.02 4692.91,2561.02 4695.87,2563.98 4695.87,2572.83 4691.56,2577.15 4631.8,2577.15 4609.25,2599.69 4609.25,2645.57 v1(4619.33,2655.64)
CK_N: NT2.2 U1.H11 U2.F8 | length 1281.6
  L1 w5: U1.H11@3897.64,2657.48 3908.7,2668.54 3908.7,2684 3922.62,2697.92 3922.62,2702.81 3931.05,2711.24 3942.97,2711.24 3951.4,2702.81 3951.4,2696.6 3965.54,2682.46 3985.89,2682.46 4001.36,2666.99 4001.36,2651.52 4010.38,2642.5 4025.85,2642.5 4030.55,2637.8 4040.31,2637.8 4045.02,2642.5 4065.22,2642.5 4069.61,2638.11 4071.26,2638.11 4071.58,2637.8 4079.68,2637.8 4084.39,2642.5 4104.59,2642.5 4106.12,2640.97 4134.94,2640.97 4155.84,2620.08 4160.43,2620.08 4160.43,2648.62 4158.47,2650.59 4154.53,2650.59 4152.56,2652.56 4152.56,2661.42 4154.89,2663.75 4184.26,2663.75 4190.12,2657.89 4190.12,2617.97 4203.74,2617.97 4203.74,2657.48 ; 4203.54,2657.69 4209.6,2663.75 4227.57,2663.75 4233.43,2657.89 4233.43,2617.97 4247.05,2617.97 4247.05,2657.69 ; 4246.84,2657.89 4252.91,2663.95 4270.88,2663.95 4276.73,2658.1 4276.73,2617.97 4290.36,2617.97 4290.36,2657.89 ; 4290.15,2658.1 4296.21,2664.16 4314.18,2664.16 4320.04,2658.3 4320.04,2617.97 4333.66,2617.97 4333.66,2658.1 ; 4333.46,2658.3 4339.52,2664.36 4357.49,2664.36 4363.35,2658.51 4363.35,2617.97 4376.97,2617.97 4376.97,2658.3 ; 4376.76,2658.51 4382.83,2664.57 4400.8,2664.57 4406.65,2658.71 4406.65,2617.97 4428.15,2617.97 4433.07,2622.89 4433.07,2625.98 4441.7,2634.61 4456.46,2634.61 4459.65,2637.8 4480.03,2637.8 4485.13,2632.7 4506.04,2632.7 4511.77,2626.97 4519.69,2626.97 4531.5,2638.78 U2.F8@4531.5,2649.61
CK_P: NT1.2 U1.G12 U2.E8 | length 1281.5
  L1 w5: U1.G12@3937.01,2696.85 3954.23,2679.63 3954.23,2674.7 3949.8,2670.28 3949.8,2665.35 3952.76,2662.4 3960.02,2662.4 3969.49,2671.87 3982.34,2671.87 3990.77,2663.44 3990.77,2647.97 3997.05,2641.69 3997.05,2635.83 3991.14,2629.92 3991.14,2625 3994.09,2622.05 3999.34,2622.05 4009.79,2632.5 4021.71,2632.5 4026.41,2627.8 4044.45,2627.8 4049.16,2632.5 4061.08,2632.5 4065.47,2628.11 4067.12,2628.11 4067.44,2627.8 4083.82,2627.8 4088.53,2632.5 4100.45,2632.5 4105.15,2627.8 4112.23,2627.8 4115.41,2630.97 4130.8,2630.97 4153.8,2607.97 4169.5,2607.97 4170.43,2608.91 4170.43,2653.54 ; 4170.43,2653.75 4180.12,2653.75 4180.12,2609.11 4181.26,2607.97 4212.6,2607.97 ; 4212.8,2607.97 4213.74,2608.91 4213.74,2653.54 ; 4213.74,2653.75 4223.43,2653.75 4223.43,2609.11 4224.57,2607.97 4255.91,2607.97 4257.05,2609.11 4257.05,2653.75 ; 4257.05,2653.95 4266.73,2653.95 4266.73,2609.32 4268.08,2607.97 4299.01,2607.97 4300.36,2609.32 4300.36,2653.95 ; 4300.36,2654.16 4310.04,2654.16 4310.04,2609.52 4311.59,2607.97 4342.11,2607.97 4343.66,2609.52 4343.66,2654.16 ; 4343.66,2654.36 4353.35,2654.36 4353.35,2611.22 4356.59,2607.97 4385.21,2607.97 4386.97,2609.73 4386.97,2654.36 ; 4386.97,2654.57 4396.65,2654.57 4396.65,2609.93 4398.62,2607.97 4432.29,2607.97 4443.07,2618.75 4443.07,2620.08 4447.6,2624.61 4454.36,2624.61 4459.88,2619.09 4459.88,2611.28 4469.54,2601.61 4484.48,2601.61 4486.4,2603.52 4503.72,2603.52 4509.8,2597.44 4521.69,2597.44 4525.45,2601.2 4525.45,2612.07 U2.E8@4531.5,2618.11
CKE: U1.D14 U2.F2 | length 1280.1
  L1 w5: U1.D14@4015.75,2814.96 4040.35,2790.35 4074.04,2790.35 4083.66,2799.98 4121.72,2799.98 4138.23,2783.46 4422.24,2783.46 4426.18,2779.53 4426.18,2773.62 4423.23,2770.67 4373.03,2770.67 4368.11,2765.75 4368.11,2760.83 4374.37,2754.57 4428.33,2754.57 4437.75,2763.98 4437.75,2824.3 4458.41,2844.96 4472.11,2844.96 4496.49,2869.33 4551.55,2869.33 4556.47,2874.26 4722.99,2874.26 4743.32,2853.92 4771.08,2853.92 4797.24,2827.76 4797.24,2676.8 4771.86,2651.42 4743.57,2651.42 4741.76,2649.61 U2.F2@4720.47,2649.61